# EAGLE board untitled (EAGLE 6.4)
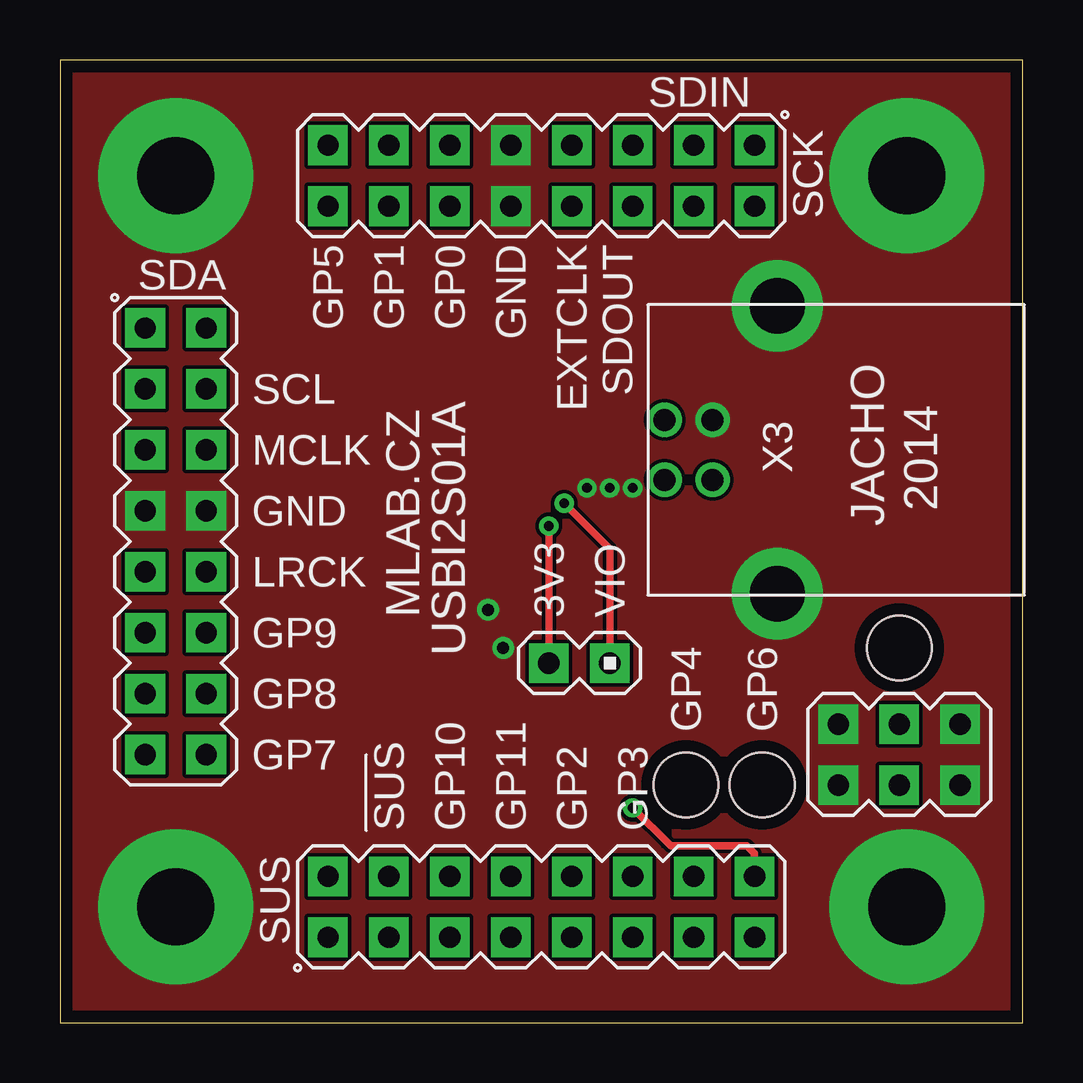
[diagram p0: board, top side]
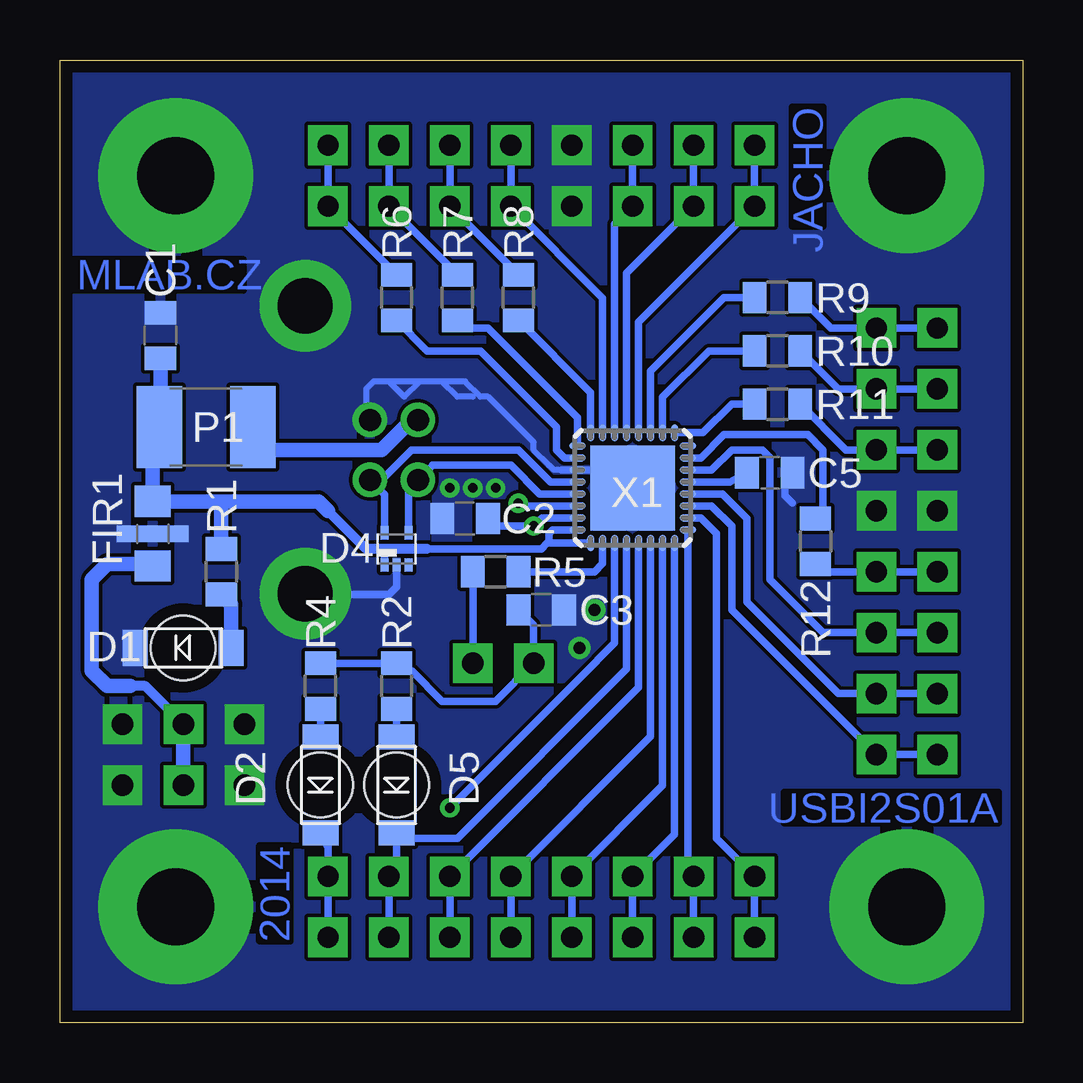
[diagram p1: board, bottom side, seen from below]

Size 40.13 x 40.13 mm. Coordinates in mm from the lower left corner, seen from the top.
Outline: 0,0 40.13,0 40.13,40.13 0,40.13 0,0
Copper layers (1*16): Top 0.035mm / dielectric 1.5mm / Bottom 0.035mm
Design rules "jacho": minimum track width 8mil, minimum drill 16mil, track to track 6mil, track to pad 6mil, pad to pad 6mil, via to via 6mil, smd to smd 6mil, copper to edge 20mil, drill to drill 8mil, minimum pad ring 10mil, minimum via ring 8mil, stop-mask expansion 4mil, vias tented up to drill 25mil, thermal gap 0mil

## Footprints (pad centres in the part's own frame; a part is rotated, then mirrored left to right if it is on the bottom)
C0805 = smd 0.991 x 1.295: 1 -0.95,0; 2 0.95,0
1206_2 = smd 1.5 x 1.05: A 0,-2; K 0,2 | hole 2.7: 0,0
SOT553 = smd 0.35 x 0.55: 1 -0.5,-0.675; 2 0,-0.675; 3 0.5,-0.675; 4 0.5,0.675; 5 -0.5,0.675
F0805 = smd 1.3 x 1.5: 1 -1.35,0; 3 1.35,0 | smd 0.7 x 3: 2 0,0
1812 = smd 1.9 x 3.4: 1 -1.95,0; 2 1.95,0
0805 = smd 0.991 x 1.295: 1 -0.95,0; 2 0.95,0
MA02-1 = drill 0.889 pad 1.651 square: 1 -1.27,0; 2 1.27,0
MA08-2 = drill 0.889 pad 1.651 square: 1 -8.89,-1.27; 2 -8.89,1.27; 3 -6.35,-1.27; 4 -6.35,1.27; 5 -3.81,-1.27; 6 -3.81,1.27; 7 -1.27,-1.27; 8 -1.27,1.27; 9 1.27,-1.27; 10 1.27,1.27; 11 3.81,-1.27; 12 3.81,1.27; 13 6.35,-1.27; 14 6.35,1.27; 15 8.89,-1.27; 16 8.89,1.27
MA03-2 = drill 0.889 pad 1.651 square: 1 -2.54,-1.27; 2 -2.54,1.27; 3 0,-1.27; 4 0,1.27; 5 2.54,-1.27; 6 2.54,1.27
QFN-32 = smd 0.7 x 0.3: 1 -2.3,1.75; 2 -2.3,1.25; 3 -2.3,0.75; 4 -2.3,0.25; 5 -2.3,-0.25; 6 -2.3,-0.75; 7 -2.3,-1.25; 8 -2.3,-1.75; 17 2.3,-1.75; 18 2.3,-1.25; 19 2.3,-0.75; 20 2.3,-0.25; 21 2.3,0.25; 22 2.3,0.75; 23 2.3,1.25; 24 2.3,1.75 | smd 0.3 x 0.7: 9 -1.75,-2.3; 10 -1.25,-2.3; 11 -0.75,-2.3; 12 -0.25,-2.3; 13 0.25,-2.3; 14 0.75,-2.3; 15 1.25,-2.3; 16 1.75,-2.3; 25 1.75,2.3; 26 1.25,2.3; 27 0.75,2.3; 28 0.25,2.3; 29 -0.25,2.3; 30 -0.75,2.3; 31 -1.25,2.3; 32 -1.75,2.3 | smd 3.53 x 3.53: EXP 0,0
USB_B = drill 0.92 pad 1.422: 1 1.25,4.7; 2 -1.25,4.7; 3 -1.25,2.7; 4 1.25,2.7 | drill 2.3 pad 3.81: GND -6,0; GND2 6,0
SROUB3M = drill 3.2 pad 6.452: P$1 0,0

## Placement (x,y rotation side)
C1  1uF  [C0805]  35.94,28.64 90 bottom
C2  10uF  [C0805]  23.24,21.02 180 bottom
C3  100nF  [C0805]  20.06,17.21 0 bottom
C5  4u7  [C0805]  10.54,22.92 0 bottom
D1  ZELENA  [1206_2]  34.99,15.62 90 bottom
D2  CERVENA  [1206_2]  29.27,9.9 180 bottom
D4  SP1001-04XTG  [SOT553]  26.1,19.75 0 bottom
D5  CERVENA  [1206_2]  26.1,9.9 180 bottom
FIR1  [F0805]  36.26,20.38 270 bottom
P1  750mA  [1812]  34.03,24.83 180 bottom
R1  470R  [0805]  33.4,18.79 90 bottom
R2  470R  [0805]  26.1,14.03 270 bottom
R4  470R  [0805]  29.27,14.03 270 bottom
R5  4k7  [0805]  21.97,18.79 180 bottom
R6  33R  [0805]  26.1,30.22 90 bottom
R7  33R  [0805]  23.56,30.22 90 bottom
R8  33R  [0805]  21.02,30.22 90 bottom
R9  33R  [0805]  10.22,30.22 0 bottom
R10  33R  [0805]  10.22,28 0 bottom
R11  33R  [0805]  10.22,25.78 0 bottom
R12  33R  [0805]  8.63,20.06 270 bottom
SV1  MA02-1  [MA02-1]  21.65,14.98 0 top
SV2  [MA08-2]  20.06,4.82 0 top
SV3  [MA08-2]  20.06,35.3 180 top
SV4  [MA08-2]  4.82,20.06 270 top
SV6  [MA03-2]  34.99,11.17 180 top
X1  CP2114  [QFN-32]  16.25,22.29 0 bottom
X3  [USB_B]  29.91,23.87 90 top
X4  SROUB3M  [SROUB3M]  4.82,4.82 0 top
X5  SROUB3M  [SROUB3M]  4.82,35.3 0 top
X6  SROUB3M  [SROUB3M]  35.3,4.82 0 top
X7  SROUB3M  [SROUB3M]  35.3,35.3 0 top

## Library data of the parts
C1-C3 C5 = moje_C
D1 D2 D4 D5 = moje_diody
FIR1 P1 X4-X7 = moje
R1 R2 R4-R12 = moje_R
SV1 = moje_hrebinky
SV2-SV4 SV6 = moje_hrebinky; OC_FARNELL: unknown; OC_NEWARK: unknown
X1 = moje_io
X3 = moje_konektory

## Nets
+3.3V: C2.1 C3.1 R2.1 R4.1 SV1.1 X1.7
+5V: C1.1 D4.1 FIR1.1 P1.2 R1.2 X1.8 X1.9
/SUSPEND: SV2.3 SV2.4 X1.17
EXTCLK: SV3.7 SV3.8 X1.31
GND: C1.2 C2.2 C3.2 C5.2 D1.K D4.2 FIR1.2 SV3.9 SV3.10 SV4.7 SV4.8 SV6.1 SV6.2 SV6.5 SV6.6 X1.3 X1.EXP X3.4 X3.GND X3.GND2 X4.P$1 X5.P$1 X6.P$1 X7.P$1
GP0: SV3.11 SV3.12 X1.30
GP1: SV3.13 SV3.14 X1.29
GP2: SV2.9 SV2.10 X1.14
GP3: SV2.11 SV2.12 X1.13
GP4: D5.K SV2.13 SV2.14 X1.12
GP5: SV3.15 SV3.16 X1.28
GP6: D2.K SV2.15 SV2.16 X1.11
GP7: SV4.15 SV4.16 X1.19
GP08: SV4.13 SV4.14 X1.20
GP9: SV4.11 SV4.12 X1.22
GP10: SV2.5 SV2.6 X1.16
GP11: SV2.7 SV2.8 X1.15
LRCK: R12.2 SV4.9 SV4.10
MCLK: R11.2 SV4.5 SV4.6
N$1: D4.5 X1.4 X3.3
N$2: D4.4 X1.5 X3.2
N$3: FIR1.3 SV6.3 SV6.4
N$4: C5.1 X1.21
N$5: P1.1 X3.1
N$6: D1.A R1.1
N$11: D5.A R2.2
N$13: D2.A R4.2
N$15: R5.1 X1.10
N$31: R8.1 X1.32
N$32: R7.1 X1.1
N$33: R6.1 X1.2
N$34: R9.1 X1.27
N$35: R10.1 X1.26
N$36: R11.1 X1.25
N$37: R12.1 X1.23
SCK: R6.2 SV3.1 SV3.2
SCL: R10.2 SV4.3 SV4.4
SDA: R9.2 SV4.1 SV4.2
SDIN: R7.2 SV3.3 SV3.4
SDOUT: R8.2 SV3.5 SV3.6
SUSPEND: SV2.1 SV2.2 X1.18
VIO: R5.2 SV1.2 X1.6

## Tracks (layer width: path | path; a pad name or v marks a point on that pad's centre or on a via)
+3.3V  (via drill 0.4)
  Top 0.305: SV1.1 20.38,19.75 20.38,20.38 v20.38,20.7
  Bottom 0.305: 22.6,20.7 C2.1 21.97,20.7 v20.38,20.7 20.04,21.04 X1.7 | C3.1 20.38,16.57 SV1.1 21.97,13.4 24.19,13.4 25.46,14.66 R2.1 R4.1
+5V
  Bottom 0.305: X1.9 19.75,19.99 | X1.8 19.59,20.54 19.75,20.38 19.75,19.99 | 19.75,19.99 19.82,19.99 20.06,19.75 24.83,19.75 | D4.1 26.6,19.56 26.41,19.75
  Bottom 0.406: 24.83,19.75 26.41,19.75 27.37,19.75 28.95,21.33
  Bottom 0.61: C1.1 35.94,24.87 P1.2 35.98,25.19 36.26,25.46 FIR1.1 33.4,21.73 | 33.4,21.73 29.35,21.73 28.95,21.33 | R1.2 33.4,21.73
/SUSPEND
  Bottom 0.305: X1.17 13.95,6.33 SV2.4 SV2.3
EXTCLK
  Bottom 0.305: X1.31 17.5,27.03 17.5,30.2 SV3.8 SV3.7
GND  (via drill 0.4, 0.5)
  Bottom 0.254: 19.23,23.04 19.54,23.04 19.75,23.24 20.38,23.87 20.38,24.19 22.29,26.1 22.6,26.1 23.24,26.73 25.14,26.73 25.78,26.1 26.41,26.73 | 22.92,26.1 23.56,26.1 24.19,26.73 26.41,26.73 | 26.41,26.73 27.05,26.73 27.37,26.41 27.37,25.28 X3.4
  Bottom 0.305: 9.59,21.65 9.9,21.97 9.9,22.92 C5.2 | X1.EXP 17,23.04 X1.3 19.23,23.04 | D4.2 26.1,18.16 26.41,17.84 29.87,17.84 X3.GND
  other vias: 18.48,15.62 17.84,17.21 22.92,22.29 21.97,22.29 23.87,22.29
  pour Bottom: 0.06,40.38 40.38,40.38 40.38,0.06 0.06,0.06
  pour Top: -0.57,40.7 41.02,40.7 41.02,-0.57 -0.57,-0.57
GP0
  Bottom 0.305: X1.30 17,33.28 SV3.12 SV3.11
GP1
  Bottom 0.305: X1.29 16.5,30.61 16.5,31.24 SV3.14 SV3.13
GP2
  Bottom 0.305: X1.14 15.5,11.92 SV2.10 SV2.9
GP3
  Bottom 0.305: X1.13 16,13.96 SV2.12 SV2.11
GP4
  Bottom 0.305: D5.K 26.1,6.73 26.1,6.41 SV2.14 SV2.13 | X1.12 16.5,14.73 23.56,7.68 25.87,7.68 D5.K | 26,7.68 D5.K
GP5
  Bottom 0.305: X1.28 16,29.2 SV3.16 SV3.15
GP6  (via drill 0.4)
  Top 0.305: SV2.16 28.95,7.05 28.64,7.36 25.46,7.36 v23.87,8.95
  Bottom 0.305: SV2.15 SV2.16 28.95,7.27 | v23.87,8.95 18.48,14.35 17,15.82 X1.11 | 28.95,7.36 28.95,7.27 | 28.95,7.27 D2.K
GP7
  Bottom 0.305: SV4.15 SV4.16 12.13,17.21 12.13,20.7 12.96,21.54 X1.19
GP08
  Bottom 0.305: SV4.13 SV4.14 7.68,13.71 11.49,17.52 11.49,21.02 12.51,22.04 X1.20
GP9
  Bottom 0.305: X1.22 13.28,23.04 12.96,23.04 12.13,23.87 10.86,23.87 10.54,23.56 10.54,19.75 10.54,18.48 8.32,16.25 SV4.12 SV4.11
GP10
  Bottom 0.305: X1.16 14.5,7.84 SV2.6 SV2.5
GP11
  Bottom 0.305: X1.15 15,9.88 SV2.8 SV2.7
LRCK
  Bottom 0.305: SV4.9 SV4.10 8.31,18.79 R12.2
MCLK
  Bottom 0.305: 9.27,25.46 R11.2 7.37,23.87 SV4.6 SV4.5
N$1
  Bottom 0.305: 24.51,23.87 24.83,23.87 | D4.5 26.6,22.01 X3.3 26.71,22.62 25.46,23.87 24.83,23.87 | 24.83,23.87 21.02,23.87 20.7,23.56 19.68,22.54 X1.4
N$2
  Bottom 0.305: D4.4 25.6,22.23 X3.2 24.71,23.12 | X1.5 20.13,22.04 21.33,23.24 24.59,23.24 | 24.59,23.24 24.71,23.12 | 24.59,23.24 24.71,23.12
N$3
  Bottom 0.406: SV6.3 36.26,13.71 36.57,14.03 37.21,14.03
  Bottom 0.61: SV6.4 SV6.3 | FIR1.3 36.34,19.11 38.16,19.11 38.8,18.48 38.8,14.67 38.16,14.03 37.21,14.03
N$4
  Bottom 0.305: X1.21 12.51,22.54 12.19,22.54 C5.1
N$5
  Bottom 0.61: X3.1 25.48,25.12 26.73,23.87 28.91,23.87 32.13,23.87 32.45,24.19 32.45,24.46 P1.1
N$6
  Bottom 0.61: D1.A 32.99,17.43 R1.1
N$11
  Bottom 0.305: D5.A R2.2
N$13
  Bottom 0.305: D2.A R4.2
N$15
  Bottom 0.305: X1.10 17.5,19.13 17.84,18.79 20.38,18.79 R5.1
N$31
  Bottom 0.305: X1.32 18,26.26 R8.1
N$32
  Bottom 0.305: X1.1 18.55,25.22 20.06,26.73 22.29,28.95 23.24,28.95 R7.1
N$33
  Bottom 0.305: R6.1 24.82,28 22.6,28 19.43,24.83 19.43,23.87 19.09,23.54 X1.2
N$34
  Bottom 0.305: X1.27 15.5,27.16 12.44,30.22 R9.1
N$35
  Bottom 0.305: X1.26 15,26.08 13.08,28 R10.1
N$36
  Bottom 0.305: X1.25 13.32,24.59 12.13,25.78 R11.1
N$37
  Bottom 0.305: X1.23 13.42,23.54 12.44,24.51 8.95,24.51 8.32,23.87 8.32,21.33 | 8.32,21.33 R12.1 8.32,21.33
SCK
  Bottom 0.305: R6.2 SV3.2 SV3.1
SCL
  Bottom 0.305: SV4.3 SV4.4 7.68,26.41 R10.2
SDA
  Bottom 0.305: SV4.1 SV4.2 8,28.95 R9.2
SDIN
  Bottom 0.305: R7.2 SV3.4 SV3.3
SDOUT
  Bottom 0.305: R8.2 SV3.6 SV3.5
SUSPEND
  Bottom 0.305: X1.18 13.42,21.04 12.76,20.38 12.76,7.68 SV2.2 SV2.1
VIO  (via drill 0.4)
  Top 0.305: SV1.2 22.92,19.75 v21.02,21.65
  Bottom 0.305: R5.2 22.92,16.57 SV1.2 | X1.6 20.9,21.54 v21.02,21.65

## Text on the board
Bottom: JACHO | MLAB.CZ | USBI2S01A | 2014
tPlace: SDIN | SCK | GP5 | GP1 | GP0 | GND | EXTCLK | SDOUT | SDA | SCL | MCLK | 2014 | GND | JACHO | LRCK | MLAB.CZ | 3V3 | VIO | GP9 | USBI2S01A | GP8 | GP4 | GP6 | GP7 | SUS | GP10 | GP11 | GP2 | GP3 | SUS